# Altium PCB Filters.PcbDoc
Units mm, origin at the board's own origin, x right, y up, seen from the top; angles counter-clockwise.
Board outline 65 x 38 mm, 2 copper layers (Top Layer, Bottom Layer), stack 1.596 mm thick; 27 components, 10 nets, 56 pads, 8 vias.
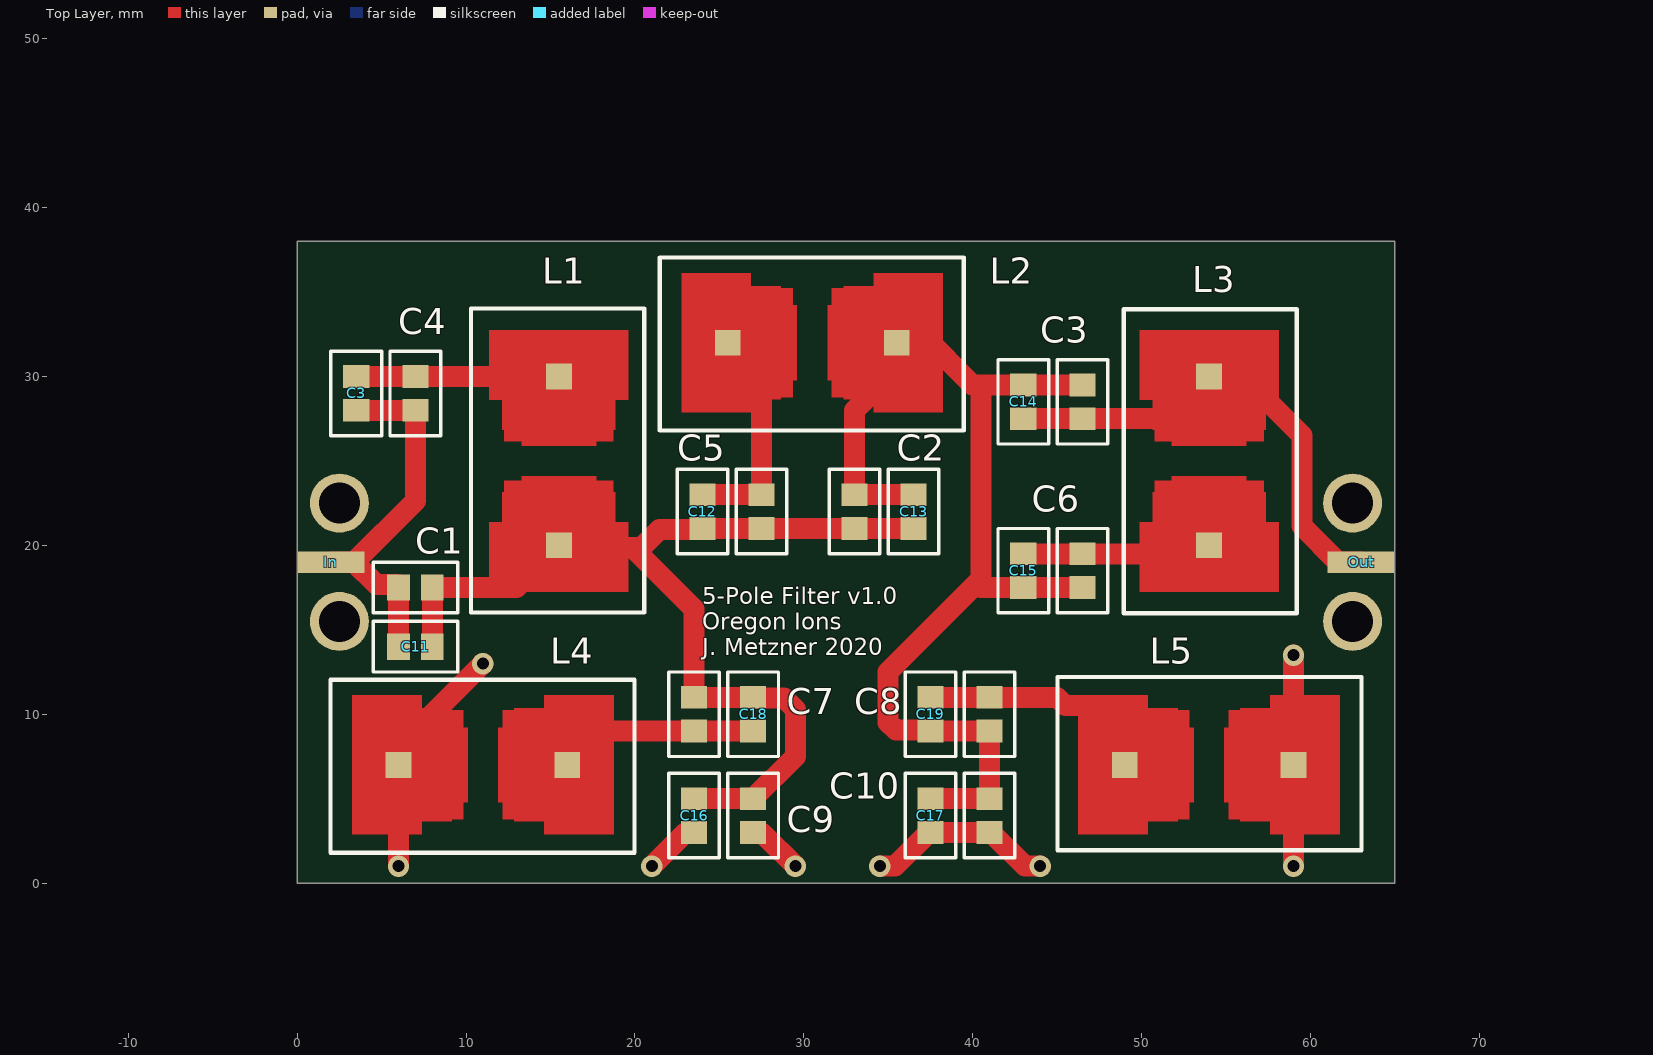
[diagram p0: Top Layer view]
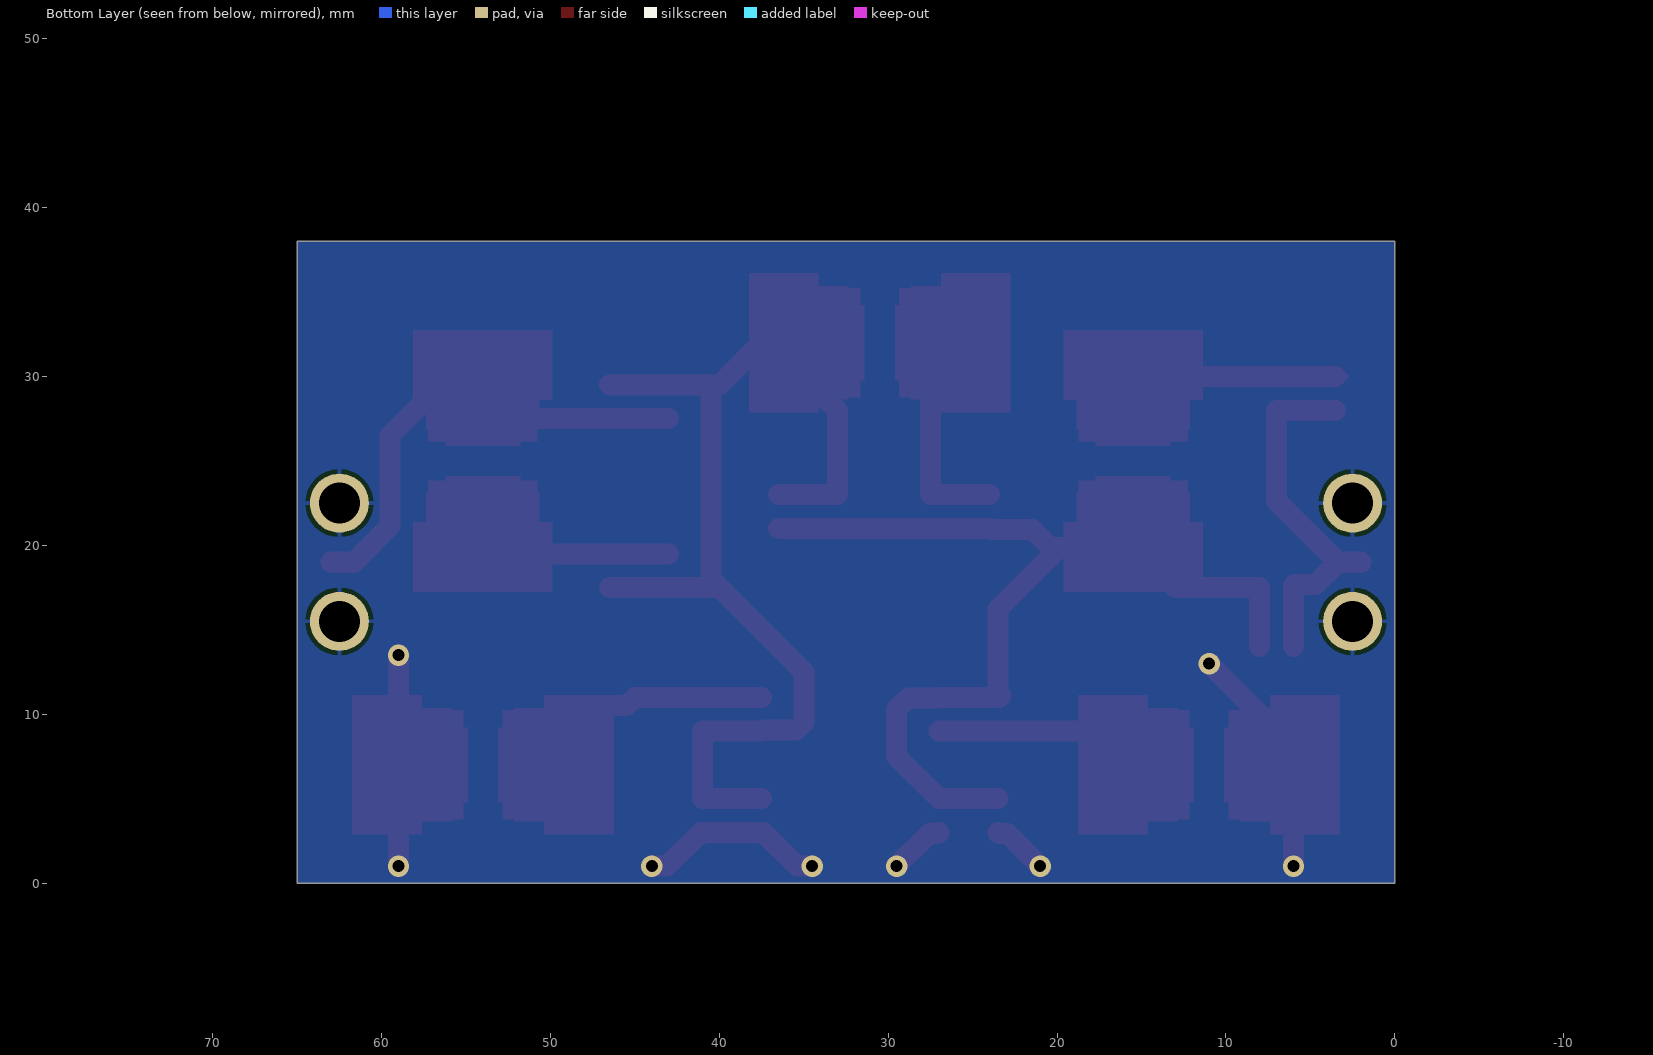
[diagram p1: Bottom Layer view, seen from below]

## Layer stack, top to bottom
Top Solder: solder mask 0.025, Solder Resist, Dk 3.5
Top Layer: signal copper 0.036
Dielectric 1: dielectric 1.524, FR-4, Dk 4.5
Bottom Layer: signal copper 0.036
Bottom Solder: solder mask 0.025, Solder Resist, Dk 3.5

## Board outline
0,0 0,38 65,38 65,0

## Design rules (kind name [scope] priority, off if disabled: settings)
Clearance [All] p1: gap=0.254 ignorepadtopadclearanceinfootprint=FALSE except(0: Arc-Hole Track-Hole SMDPad-Hole THPad-Hole Via-Hole Fill-Hole Poly-Hole Region-Hole Text-Hole)
PolygonConnect [All] p1: connectstyle=Relief reliefconductorwidth=0.254 reliefentries=4 polygonreliefangle="90 Angle" airgapwidth=0.254
RoutingVias [All] p1: holewidth=0.711 width=1.27 viastyle="Through Hole" minholewidth=0.711 minwidth=1.27 maxholewidth=0.711 maxwidth=1.27
SolderMaskExpansion [All] p1: expansion=0.102
Width [All] p1: maxlimit=2.761 minlimit=0.53 preferedwidth=1.245 substack1={15CFEC0B-E02B-49F5-844E-C9B4129F0037} substack2={48129D82-2079-4DA3-BCC4-E53AEDB3C2FD} substack3={222B623C-AB20-4979-89DB-4DADDCE175A5} substack4={9A4E75CE-5096-4B48-B635-6C2EFF51C410} impedanceprofiledriven=TRUE impedanceprofileid={AE79F53B-20E4-43C2-923B-2319234B2C78} impedanceprofilevalue=75.000000 minimp=50.000000 maximp=50.000000 favimp=50.000000
30 further rules are at their usual default settings.

## Components (designator, comment, footprint, x,y, rotation, side; value= is the part's Value field where it differs from the comment)
C1 "UC" Capacitor 7,17.5 r0 top
C2 "UC" Capacitor 33,22 r90 top
C3 "UC" Capacitor 3.5,29 r270 top
C3 "UC" Capacitor 46.5,28.5 r270 top
C4 "UC" Capacitor 7,29 r90 top
C5 "UC" Capacitor 27.5,22 r90 top
C6 "UC" Capacitor 46.5,18.5 r90 top
C7 "UC" Capacitor 23.5,10 r90 top
C8 "UC" Capacitor 27,4 r90 top
C9 "UC" Capacitor 41,10 r270 top
C10 "UC" Capacitor 41,4 r90 top
C11 "UC" Capacitor 7,14 r0 top (schematic designator C3)
C12 "UC" Capacitor 24,22 r90 top (schematic designator C3)
C13 "UC" Capacitor 36.5,22 r90 top (schematic designator C3)
C14 "UC" Capacitor 43,28.5 r90 top (schematic designator C3)
C15 "UC" Capacitor 43,18.5 r90 top (schematic designator C3)
C16 "UC" Capacitor 23.5,4 r90 top (schematic designator C3)
C17 "UC" Capacitor 37.5,4 r90 top (schematic designator C3)
C18 "UC" Capacitor 27,10 r90 top (schematic designator C3)
C19 "UC" Capacitor 37.5,10 r90 top (schematic designator C3)
In "Comment" "Edge Connector" 2,20 r0 top
L1 "UI" "Inductor Universal" 15.5,25 r270 top (schematic designator I1)
L2 "UI" "Inductor Universal" 30.5,32 r0 top (schematic designator I2)
L3 "UI" "Inductor Universal" 54,25 r90 top (schematic designator I3)
L4 "UI" "Inductor Universal" 11,7 r0 top (schematic designator I4)
L5 "UI" "Inductor Universal" 54,7 r180 top (schematic designator I5)
Out "Comment" "Edge Connector" 63,20 r0 top

## Footprints (in the part's own frame and the unit in brackets; to place one, negate y for a bottom-side part, rotate by r counter-clockwise, add the part's x,y. Pads: shape width x height; smd on the part's side, far side on the other; paste and mask are expansions set on the pad)
Capacitor [mm]
  rect 1.35x1.55 smd: 1(-1,0) 2(1,0)
  silkscreen extent -2.5,-1.5 2.5,1.5
"Edge Connector" [mm]
  rect 4x1.27 smd: 1(0,-1)
  Top Layer region: 0,-0.5
"Inductor Universal" [mil]
  rect 60x60 smd: 1(-196.85,0) 2(196.85,0)
  Top Layer region: 59.05,-60.04 103.93,-60.04 103.93,60.04 59.05,60.04
  Top Layer region: -103.94,-60.04 -59.06,-60.04 -59.06,60.04 -103.94,60.04
  Top Layer region: -130.13,-127.55 -45.09,-127.55 -45.09,127.56 -130.13,127.56
  Top Layer region: 45.07,-127.55 130.11,-127.55 130.11,127.56 45.07,127.56
  Top Layer region: 35.04,-87.59 105.12,-87.59 105.12,87.6 35.04,87.6
  Top Layer region: -105.12,-87.59 -35.04,-87.59 -35.04,87.6 -105.12,87.6
  Top Layer region: 72.44,-132.48 157.48,-132.48 157.48,132.48 72.44,132.48
  Top Layer region: -157.49,-132.48 -72.45,-132.48 -72.45,132.48 -157.49,132.48
  Top Layer region: 142.51,-162.59 232.67,-162.59 232.67,162.6 142.51,162.6
  Top Layer region: -232.69,-162.59 -142.53,-162.59 -142.53,162.6 -232.69,162.6
  Top Layer region: 214.95,-162.59 305.11,-162.59 305.11,162.6 214.95,162.6
  Top Layer region: -305.13,-162.59 -214.97,-162.59 -214.97,162.6 -305.13,162.6
  Top Layer region: -147.64,157.48
  Top Layer region: 236.22,157.48
  Top Layer region: 196.85,157.48
  Top Layer region: -944.88,-551.18
  silkscreen extent -355,-205 353,199

## Part data
C1 C2 C3 C3 C4 C5 C6 C7 C8 C9 C10 C11 C12 C13 C14 C15 C16 C17 C18 C19: library part Capacitor
L1 L2 L3 L4 L5: library part Inductor

## Free pads (board coordinates)
  round 3.5 hole 2.43: 1(2.5,15.5) 1(2.5,22.5) 1(62.5,15.5) 1(62.5,22.5)

## Via types
v1: diameter 1.27, hole 0.711, Top Layer to Bottom Layer, 8 vias

## Nets (pads, with @x,y where several pads share a name; then routed paths per layer and width w, separated by ;. In a path a pad name is that pad's centre, name@x,y a point inside that pad or via, vN(x,y) a via of type N, cw(c..) or ccw(c..) an arc to the next point about the centre after c; other vN are vias at no path point)
-: C3.2@46.5,27.5 C14.1 L3.2 Out.1 | length 29.2
  Top Layer w1.245: C14.1 46.5,27.5 51.5,27.5 L3.2 56,30 59.5,26.5 59.5,21.135 61.635,19 Out.1 ; 52.78,26.78 53.11,27.11
GND: C8.1 C10.1 C16.1 C17.1 L4.1 L5.1 pad.1 | length 44.8
  Top Layer w1.245: v1(6,1) L4.1 5.5,7.5 v1(11,13) ; v1(21,1) 22.947,2.947 23.447,2.947 C16.1 ; C8.1 27.053,2.947 27.553,2.947 v1(29.5,1) ; v1(34.5,1) 34.505,1.005 35.405,1.005 37.4,3 C17.1 40.895,3 40.947,2.947 C10.1 41.1,3 43.095,1.005 43.995,1.005 v1(44,1) ; 58.995,4.995 59,5 ; v1(59,1) L5.1 v1(59,13.5)
NetC1_2: C1.2 C2.1 C5.1 C7.2 C8.2 C11.2 C12.1 C13.1 C16.2 C18.2 L1.2 | length 60.2
  Top Layer w1.245: C11.2 C1.2 13,17.5 L1.2 18.129,20 18.253,19.876 19.863,19.876 ; C16.2 C8.2 29.5,7.5 29.5,10.271 28.823,10.947 27.053,10.947 C18.2 23.4,11 23.347,11.053 23.347,11.153 23.5,11.305 23.5,16.239 19.863,19.876 ; C13.1 C2.1 C5.1 C12.1 23.947,20.947 21.447,20.947 20.376,19.876 19.863,19.876
NetC2_2: C2.2 C3.1@46.5,29.5 C6.1 C9.2 C10.2 C13.2 C14.2 C15.1 C17.2 C19.1 L2.2 | length 72.4
  Top Layer w1.245: 35.5,31 36,31 ; C13.2 C2.2 33,28 36,31 ; C17.2 C10.2 C9.2 C19.1 37.447,9.053 35.447,9.053 35,9.5 35,12.5 40.5,18 40.5,29.5 ; 40.5,17.5 C15.1 C6.1 ; C3.1@46.5,29.5 C14.2 40.5,29.5 ; 36,31 34,33 37.105,33 37.105,32.395 40,29.5 40.5,29.5
NetC4_2: C3.1@3.5,30 C4.2 L1.1 | length 12
  Top Layer w1.243: C4.2 L1.1
  Top Layer w1.245: C3.1@3.5,30 C4.2
NetC5_2: C5.2 C12.2 L2.1 | length 13.3
  Top Layer w1.245: C12.2 C5.2 27.5,30 L2.1
NetC6_2: C6.2 C15.2 L3.1 | length 11.9
  Top Layer w1.245: C15.2 C6.2 50.28,19.5 50.78,20 L3.1 L3.1@53.5,19.5
NetC7_1: C7.1 C18.1 L4.2 | length 11.8
  Top Layer w1.245: L4.2 18,9 20,9 C7.1 C18.1
NetC9_1: C9.1 C19.2 L5.2 | length 14
  Top Layer w1.245: C19.2 C9.1 45,11 45.492,10.508 46.873,10.508 47.1,10.28 47.1,8.9 L5.2
VCC: C1.1 C3.2@3.5,28 C4.1 C11.1 In.1 | length 22.4
  Top Layer w1.245: In.1 In.1@3.365,19 ; C3.2@3.5,28 C4.1 6.9,28 6.847,27.947 6.847,27.847 7,27.695 7,22.635 In.1@3.365,19 ; C11.1 C1.1 6,17.6 5.93,17.67 4.695,17.67 In.1@3.365,19

## Polygon pours and split planes (outlines as drawn)
GND on Bottom Layer (solid, pour order 10): 0,38 65,38 65,0 0,0

## Silkscreen, mask and mechanical layers (free items; w line width, h text height)
Top Overlay:
  text "5-Pole Filter v1.0 / Oregon Ions / J. Metzner 2020" at 24,13.5 h1
Bottom Solder:
  rectangle: 0,0 65,38
Board Outline:
  the board outline again, w0.1